# EAGLE board PCB_V1_v1 (EAGLE 9.7.0)
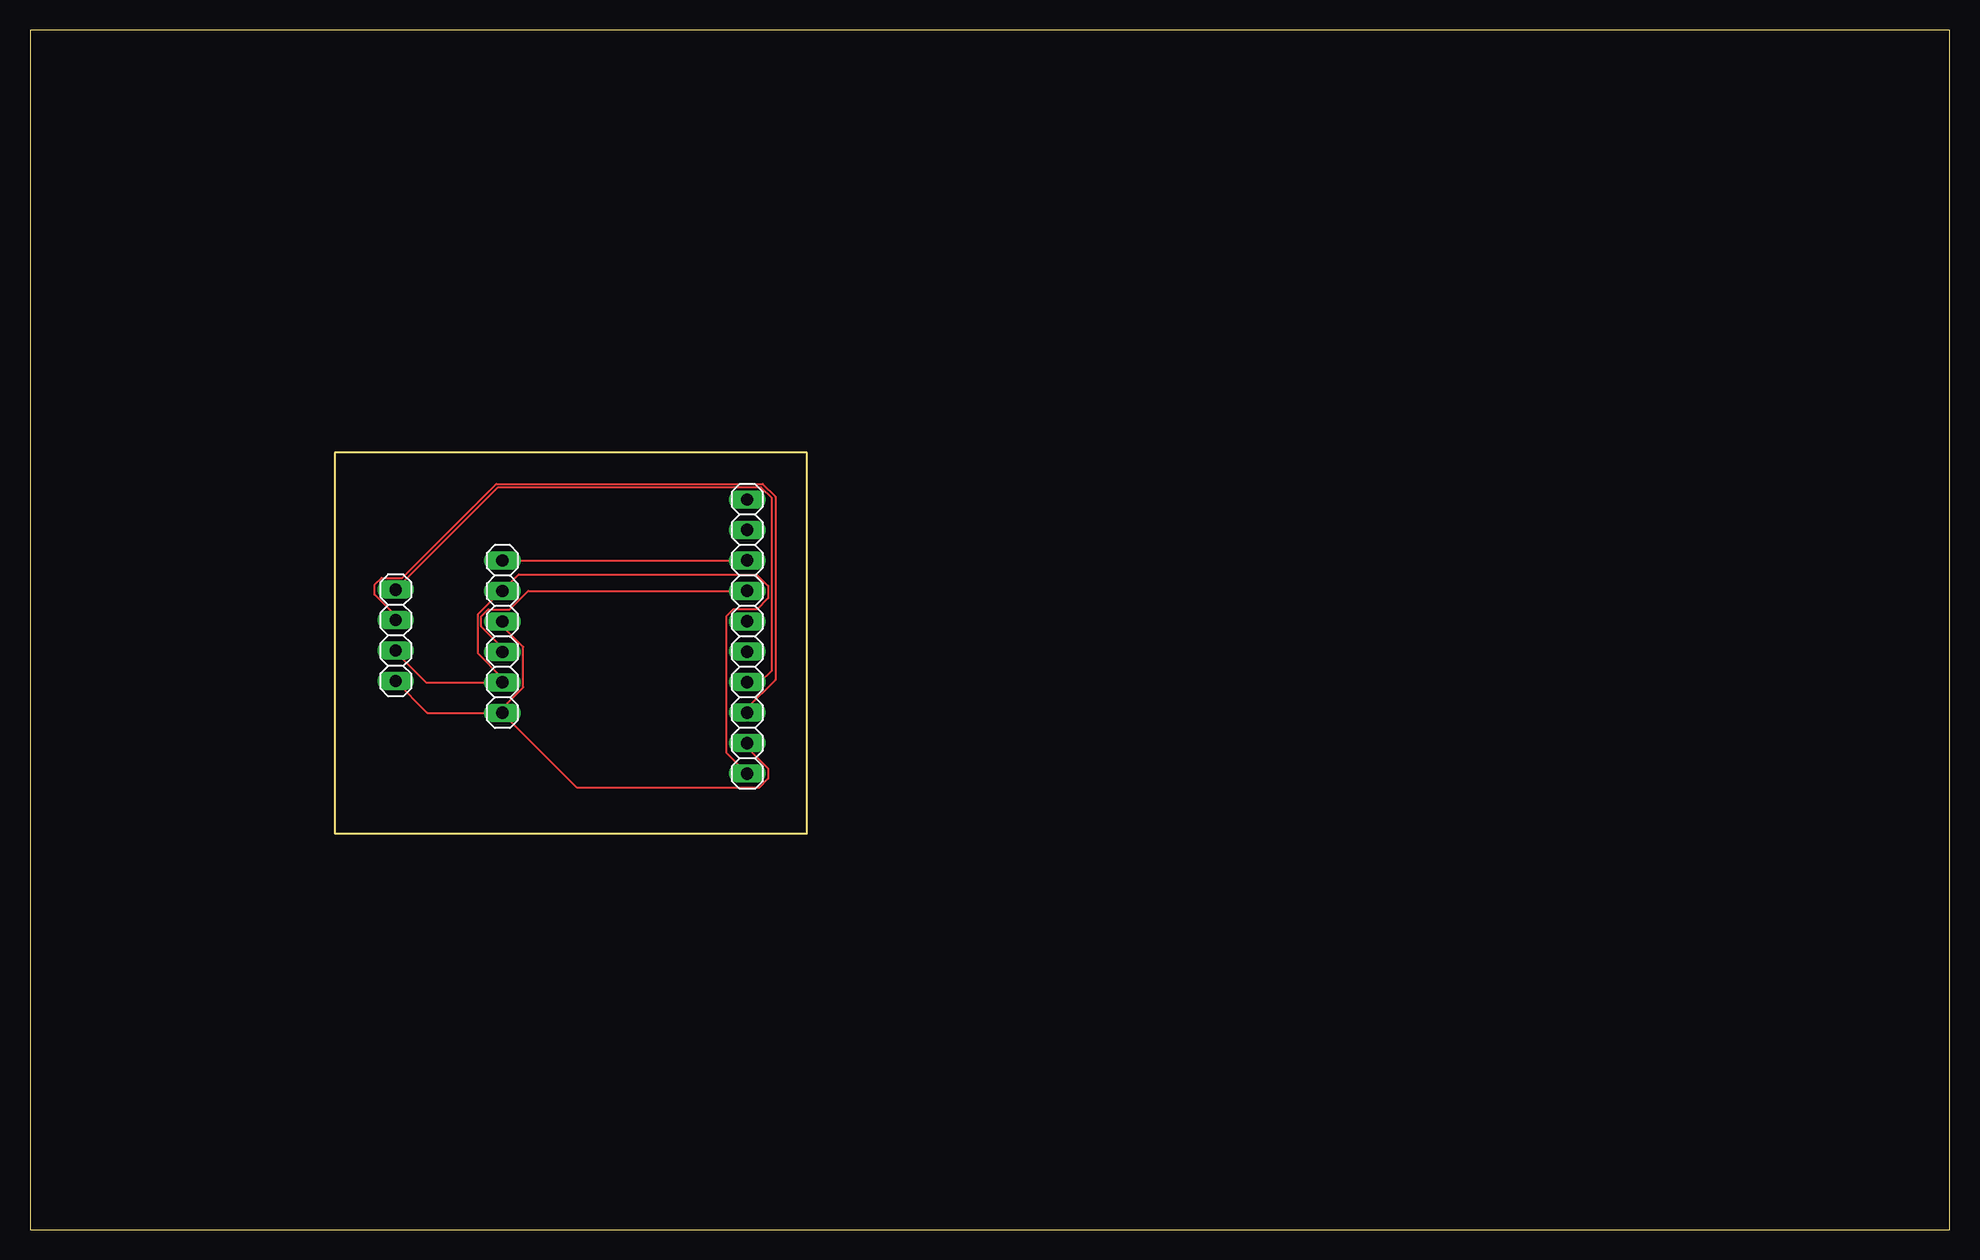
[diagram p0: board, top side]

Size 160 x 100 mm. Coordinates in mm from the lower left corner, seen from the top.
Outline: 0,0 160,0 160,100 0,100 0,0
Outline: 64.77,33.02 64.77,64.77 25.4,64.77 25.4,33.02 64.77,33.02
Copper layers (1*16): Top / Bottom
Stack-up Default Layer Stack: Top User Defined 0.035mm / Dielectric-1 User Defined 1.5mm / Bottom User Defined 0.035mm
Design rules: minimum drill size 0.35mm, minimum copper width 6mil, keepout clearance 0mil, drill distance 6mil, via restrict clearance 0mil, dimension clearance 40mil, restrict clearance 0mil, copper clearance wire_polygon to wire_polygon 6mil, copper clearance wire_polygon to pad_smd 6mil, copper clearance wire_polygon to via 6mil, copper clearance pad_smd to pad_smd 6mil, copper clearance pad_smd to via 6mil, copper clearance via to via 6mil, copper clearance smd to pad (same net) 6mil, copper clearance smd to via (same net) 6mil, copper clearance smd to smd (same net) 6mil

## Footprints (pad centres in the part's own frame; a part is rotated, then mirrored left to right if it is on the bottom)
1X10 = drill 1.016 long: 1 -11.43,0; 2 -8.89,0; 3 -6.35,0; 4 -3.81,0; 5 -1.27,0; 6 1.27,0; 7 3.81,0; 8 6.35,0; 9 8.89,0; 10 11.43,0
1X04 = drill 1.016 long: 1 -3.81,0; 2 -1.27,0; 3 1.27,0; 4 3.81,0
1X06 = drill 1.016 long: 1 -6.35,0; 2 -3.81,0; 3 -1.27,0; 4 1.27,0; 5 3.81,0; 6 6.35,0

## Placement (x,y rotation side)
JP1  PINHD-1X10  [1X10]  59.78,49.44 270 top
PI_CONNECTOR  PINHD-1X4  [1X04]  30.48,49.53 270 top
SENSOR_CONNECTOR  PINHD-1X6  [1X06]  39.37,49.43 270 top

## Library data of the parts
JP1 = Connector; CATEGORY: Connectors; DESCRIPTION: Header-Straight-10 Position; PACKAGE_TYPE: Through Hole; PITCH: 0.100" (2.54mm); SUBCATEGORY: Headers; TYPE: Male Pins
PI_CONNECTOR = Connector; CATEGORY: Connectors; DESCRIPTION: Header-Straight-4 Position; PACKAGE_TYPE: Through Hole; PITCH: 0.100" (2.54mm); SUBCATEGORY: Headers; TYPE: Male Pins
SENSOR_CONNECTOR = Connector; CATEGORY: Connectors; DESCRIPTION: Header-Straight-6 Position; PACKAGE_TYPE: Through Hole; PITCH: 0.100" (2.54mm); SUBCATEGORY: Headers; TYPE: Male Pins

## Nets
3.3V: JP1.10 PI_CONNECTOR.3 SENSOR_CONNECTOR.2 SENSOR_CONNECTOR.5
GND: JP1.9 PI_CONNECTOR.4 SENSOR_CONNECTOR.3 SENSOR_CONNECTOR.6
N$3: JP1.4 SENSOR_CONNECTOR.4
N$4: JP1.3 SENSOR_CONNECTOR.1
SCL: JP1.8 PI_CONNECTOR.2
SDA: JP1.7 PI_CONNECTOR.1

## Tracks (layer width: path | path; a pad name or v marks a point on that pad's centre or on a via)
3.3V
  Top 0.152: PI_CONNECTOR.3 30.48,48.16 33.02,45.62 SENSOR_CONNECTOR.5 39.37,45.99 37.31,48.05 37.31,51.28 39.27,53.24 SENSOR_CONNECTOR.2 40.74,54.61 60.58,54.61 61.54,53.66 61.54,52.65 60.59,51.7 58.61,51.7 58.03,51.12 58.03,39.76 JP1.10
GND
  Top 0.152: PI_CONNECTOR.4 33.12,43.08 SENSOR_CONNECTOR.6 | SENSOR_CONNECTOR.6 39.37,43.45 41.12,45.21 41.12,48.57 39.37,50.32 SENSOR_CONNECTOR.3 | SENSOR_CONNECTOR.6 45.62,36.83 60.77,36.83 61.54,37.6 61.54,38.42 59.78,40.17 JP1.9
N$3
  Top 0.152: SENSOR_CONNECTOR.4 39.37,48.53 37.62,50.29 37.62,51.11 38.2,51.69 39.98,51.69 41.54,53.25 JP1.4
N$4
  Top 0.152: SENSOR_CONNECTOR.1 59.59,55.78 59.69,55.88 JP1.3
SCL
  Top 0.152: PI_CONNECTOR.2 30.48,51.18 28.73,52.93 28.73,53.75 29.31,54.33 31.04,54.33 38.87,62.16 61.08,62.16 62.15,61.1 62.15,45.83 59.78,43.46 JP1.8
SDA
  Top 0.152: JP1.7 60.87,45.63 61.84,46.6 61.84,60.97 60.96,61.86 39,61.86 PI_CONNECTOR.1